# Altium PCB PNEV5180B_V2.0.PcbDoc (part 1 of 2)
Units mm, origin at the board's own origin, x right, y up, seen from the top; angles counter-clockwise.
Board outline 154.43 x 67.26 mm, 4 copper layers (Top Layer, Top, Internal Plane 1, MidLayer1, Bottom Layer, Bottom), stack 1.42 mm thick; 217 components, 117 nets, 604 pads, 342 vias.
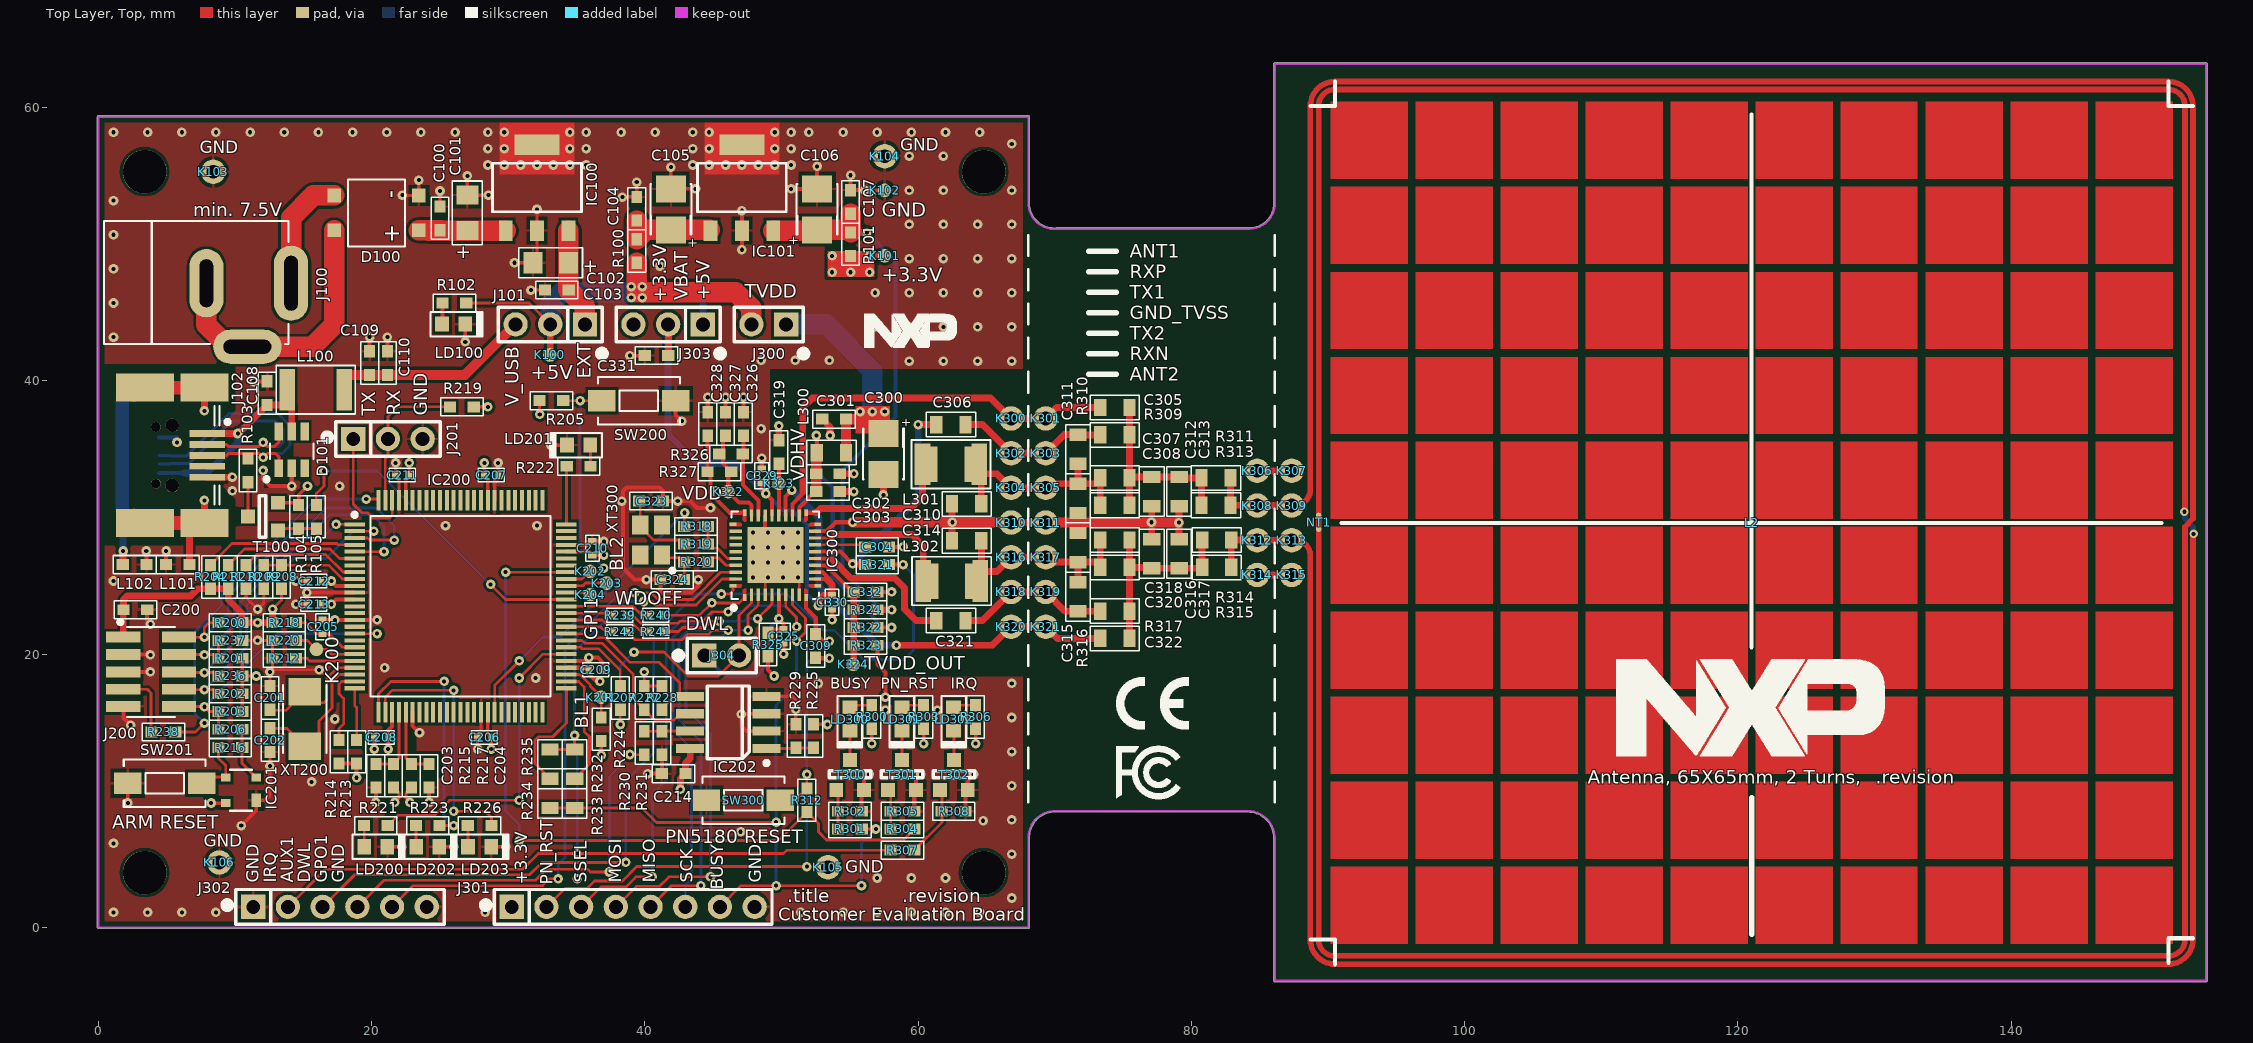
[diagram p0: Top Layer, Top view]
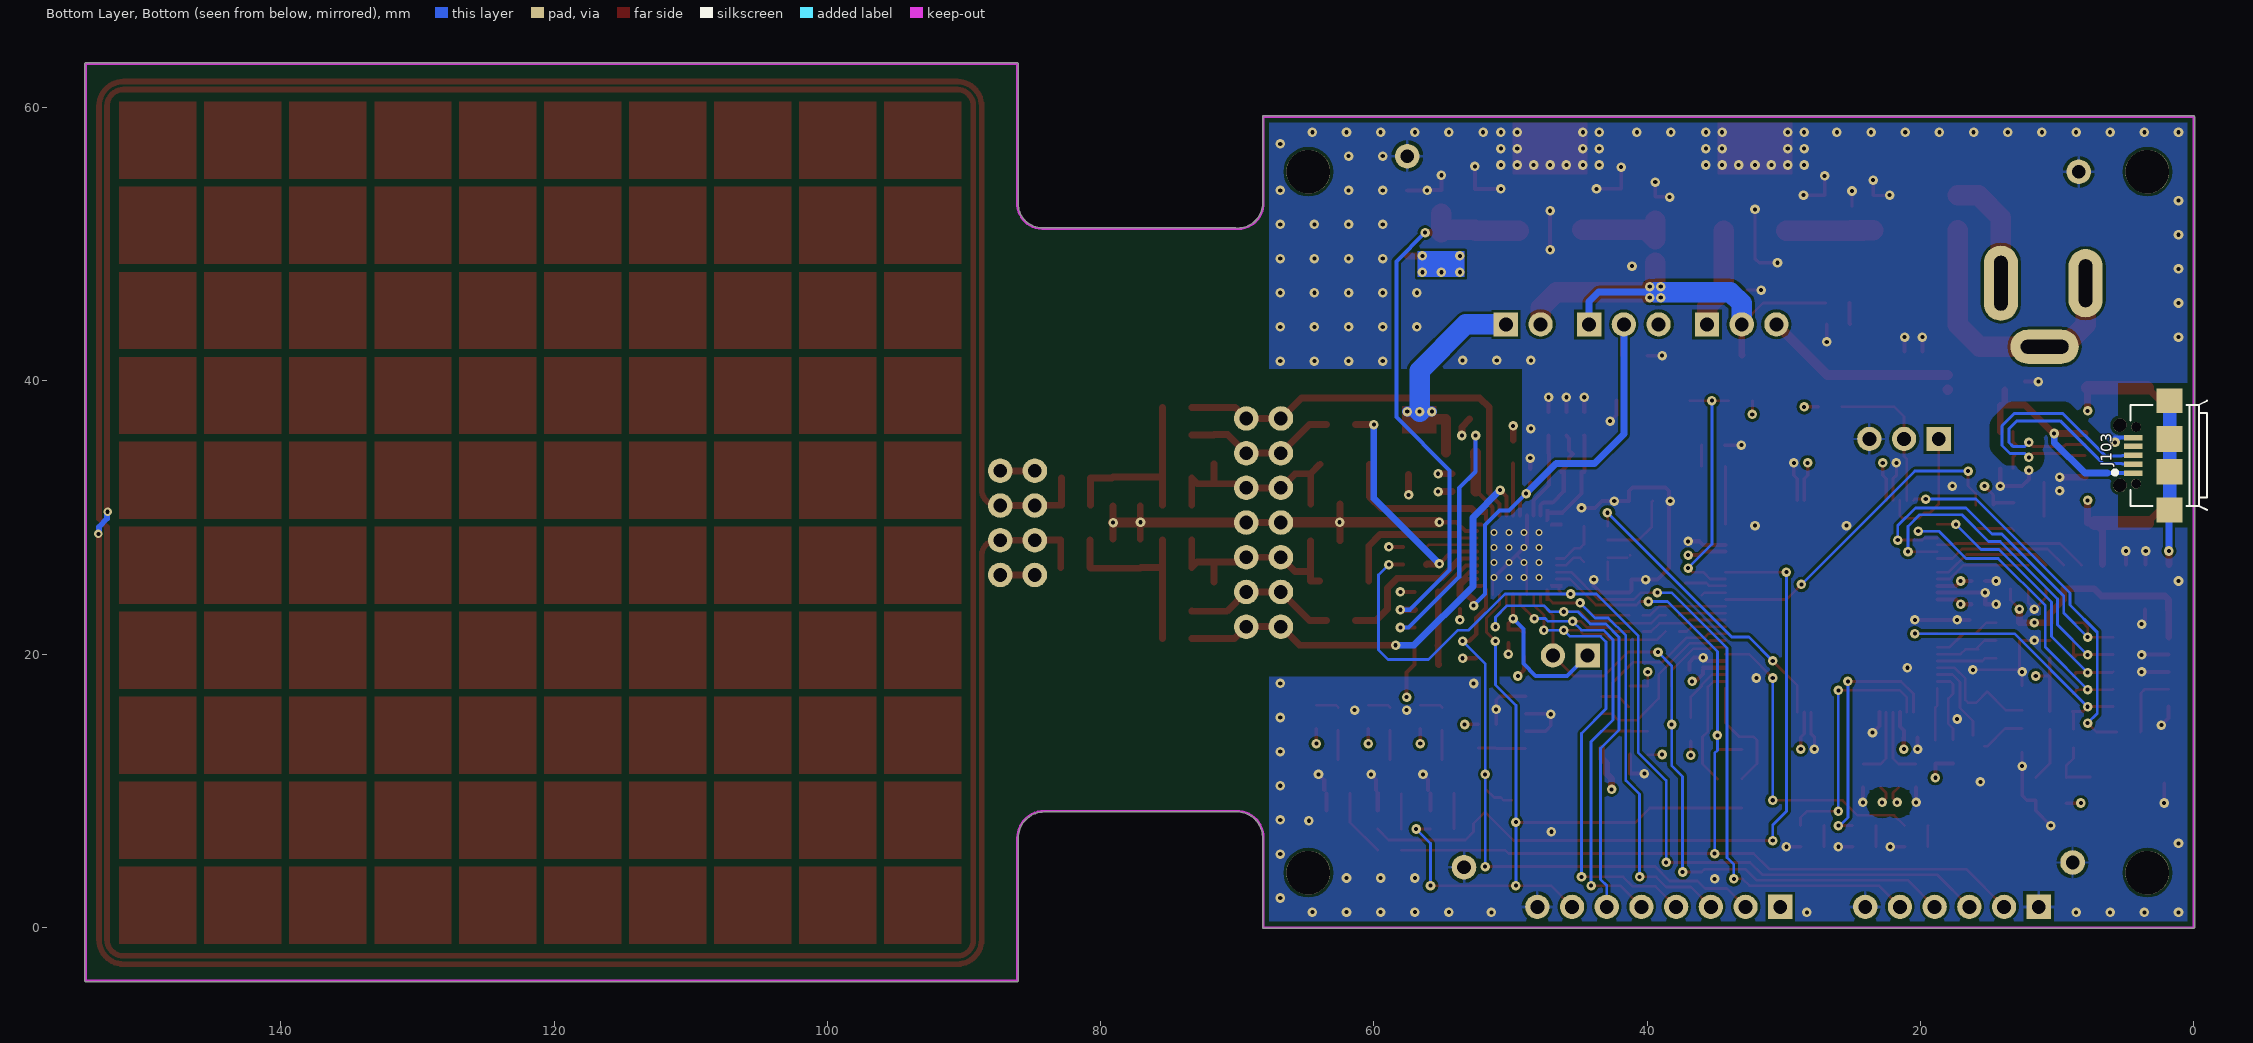
[diagram p1: Bottom Layer, Bottom view, seen from below]
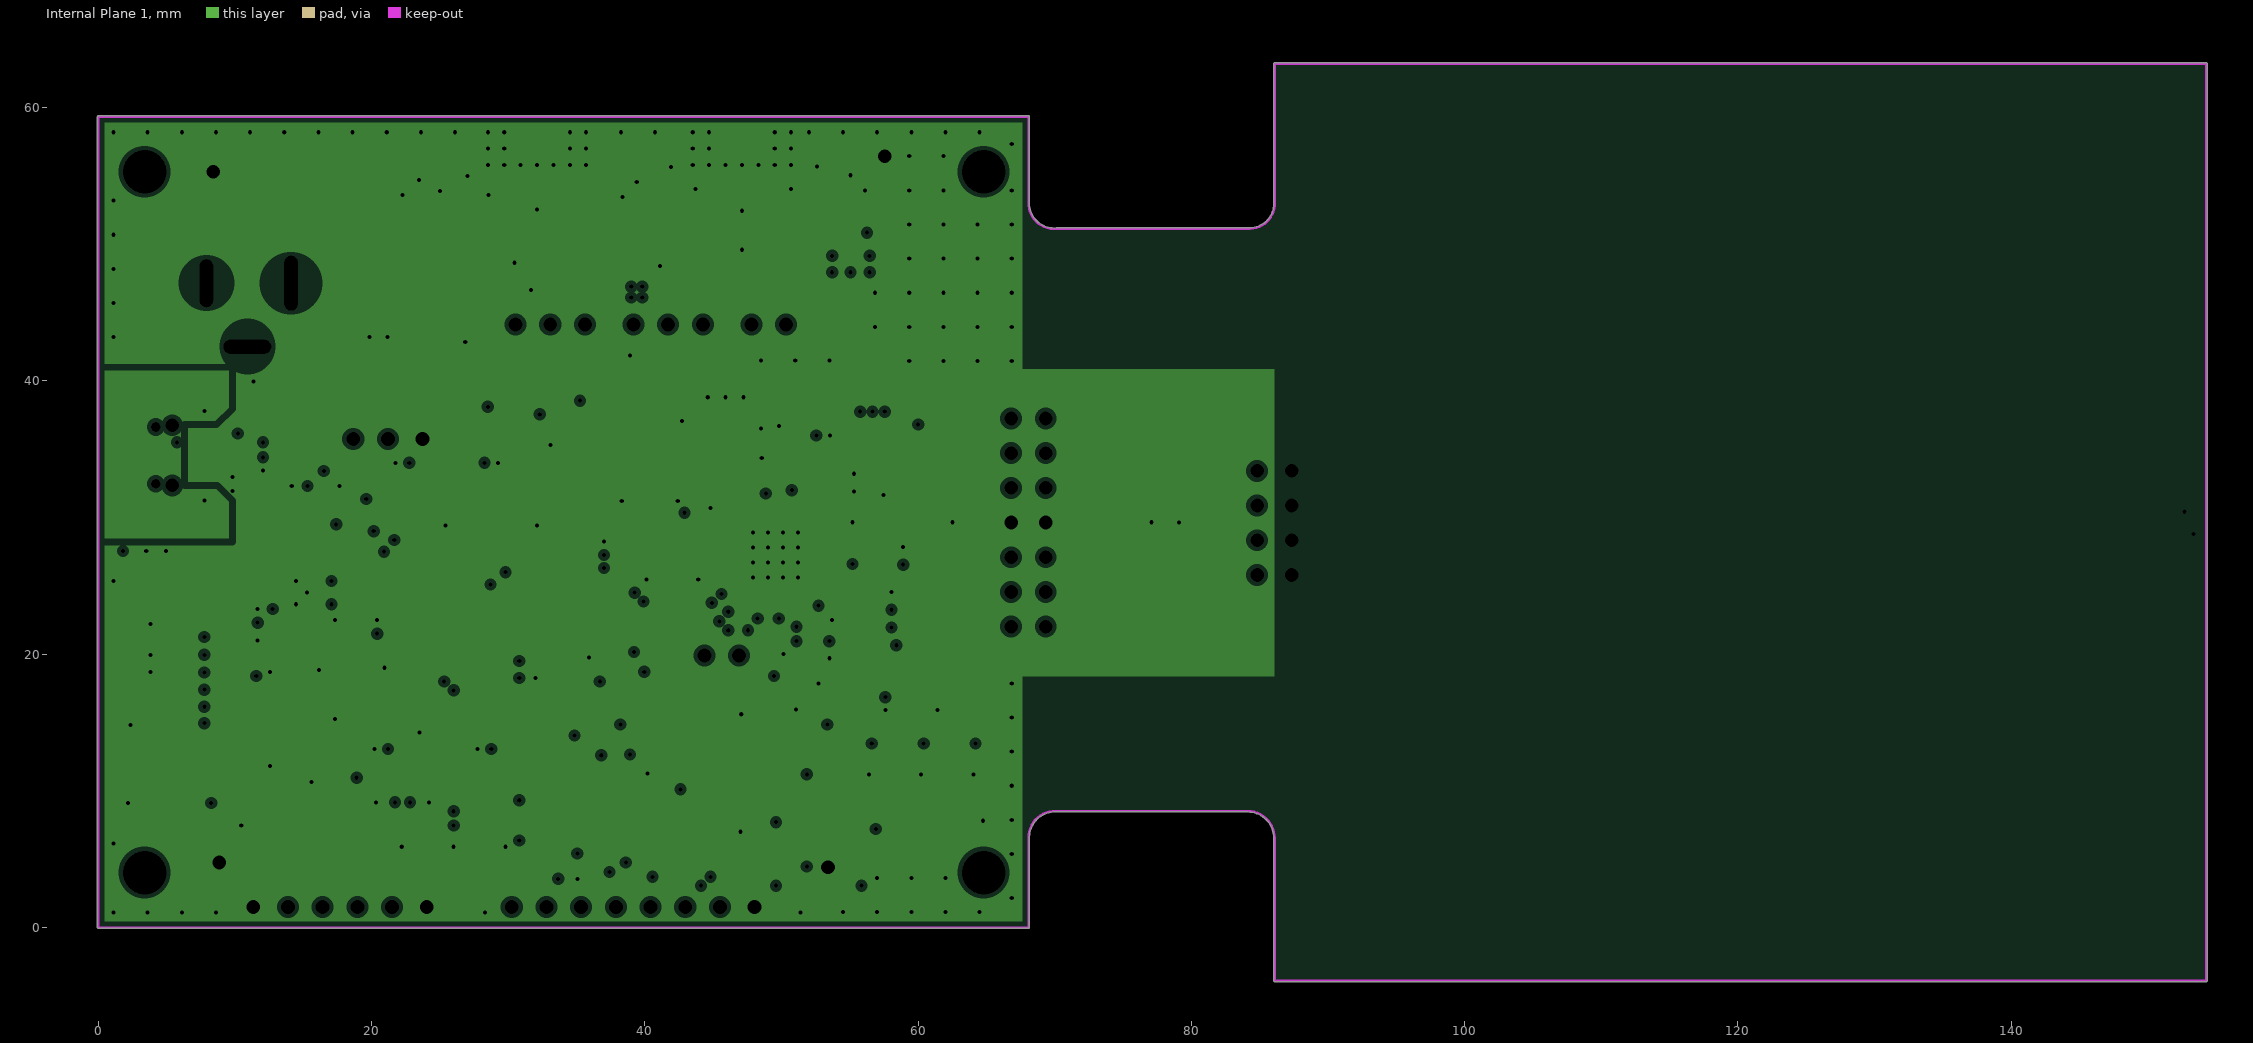
[diagram p2: Internal Plane 1, clearances drawn from the general rule]
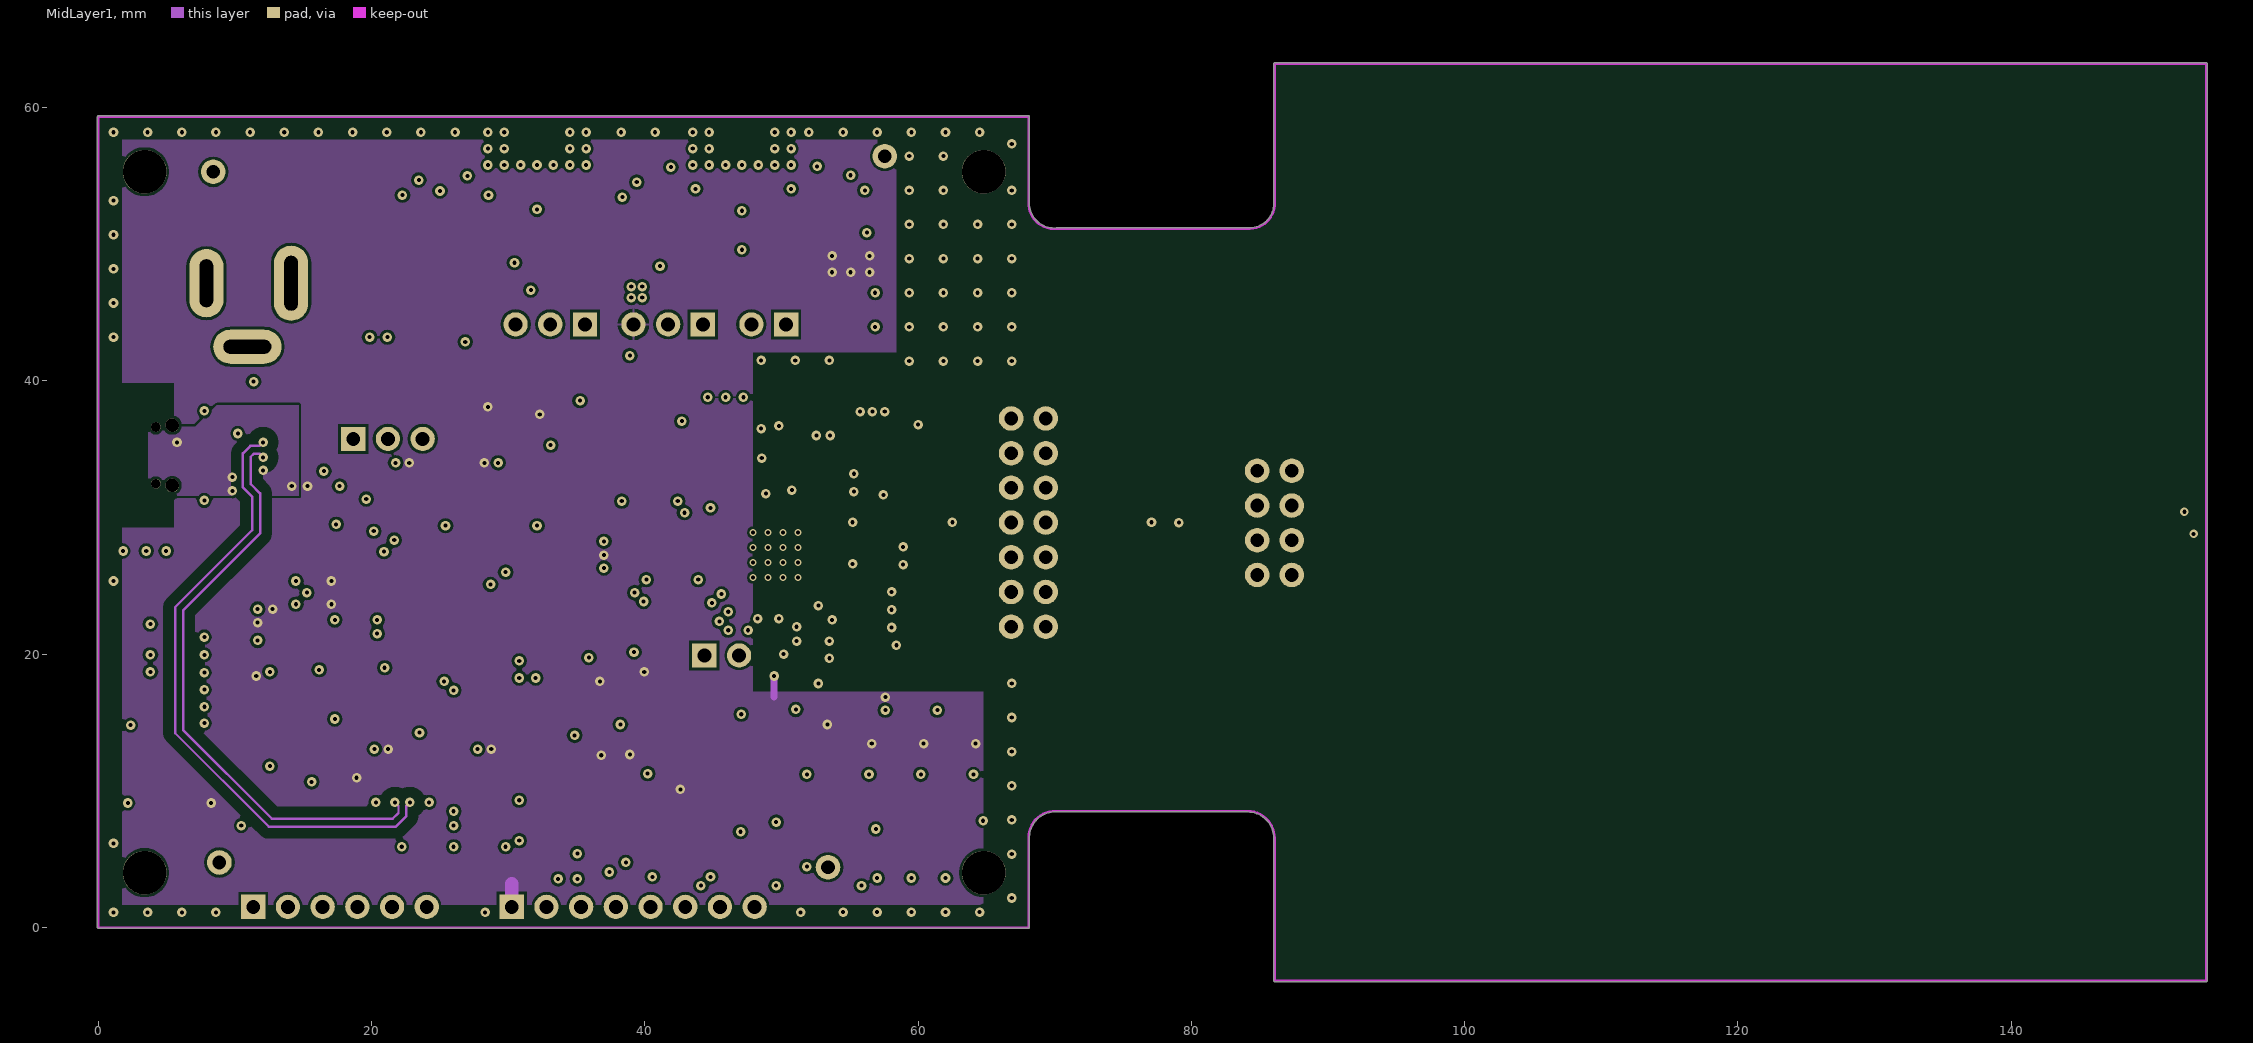
[diagram p3: MidLayer1]

## Layer stack, top to bottom
Top Solder, Top Mask: solder mask 0.0102, Solder Resist, Dk 3.5
Top Layer, Top: signal copper 0.035
Dielectric1: prepreg 0.14, FR-4, Dk 4.3
Internal Plane 1: plane copper 0.035, net (Multiple Nets)
Dielectric3: core 1, FR-4, Dk 4.3
MidLayer1: signal copper 0.035
Dielectric2: prepreg 0.14, FR-4, Dk 4.3
Bottom Layer, Bottom: signal copper 0.035
Bottom Solder, Bot Mask: solder mask 0.0102, Solder Resist, Dk 3.5

## Board outline
-0.075,0 ccw(c0,0) 0,-0.075 68.072,-0.075 ccw(c68.072,0) 68.147,0 68.147,6.617 cw(c70.015,6.58) 70.052,8.448 ccw(c70.053,8.523) 70.053,8.448 84.125,8.448 ccw(c84.125,8.523) 84.125,8.448 cw(c84.112,6.529) 86.031,6.529 cw(c84.112,6.529) 86.031,6.517 cw(c84.112,6.529) 86.031,6.517 86.031,6.516 cw(c86.106,6.516) 86.031,6.517 86.031,6.516 86.031,-3.9 ccw(c86.106,-3.9) 86.106,-3.975 154.28,-3.975 ccw(c154.28,-3.9) 154.355,-3.9 154.355,63.209 ccw(c154.28,63.209) 154.28,63.285 86.106,63.285 ccw(c86.106,63.209) 86.031,63.209 86.031,53.049 ccw(c86.106,53.049) 86.031,53.047 cw(c84.239,52.986) 86.032,52.986 cw(c84.239,52.986) 84.301,51.194 cw(c84.239,52.986) 84.3,51.194 84.303,51.194 70.129,51.194 ccw(c70.129,51.119) 70.123,51.194 cw(c69.964,53.011) 68.147,52.849 68.147,59.323 ccw(c68.072,59.323) 68.072,59.398 0,59.398 ccw(c0,59.323) -0.075,59.323

## Design rules (kind name [scope] priority, off if disabled: settings)
Clearance Clearance_1 [InNet('NetK312_1') vs InNet('NetK308_1')] p1: gap=0.13
Clearance Clearance_poly1 [InNamedPolygon('Mid1-GND_1') or InNamedPolygon('Mid1+3.3V') or InNamedPolygon('Top-GND_1') or InNamedPolygon('Bot-GND_1') vs (InDifferentialPairClass('All Differential Pairs'))] p2: gap=0.8
Clearance [All] p3: gap=0.2
ComponentClearance [All] p1: gap=0.254 collisioncheckmode=3 verticalgap=0 showdistances=FALSE
DiffPairsRouting DiffPairsRouting_90 [InDifferentialPairClass('90ohm')] p1: maxlimit=0.4 minlimit=0.3 mostfreqgap=0.4 toplayer_maxgap=0.3 toplayer_prefgap=0.3 toplayer_minwidth=0.22 toplayer_maxwidth=0.22 toplayer_prefwidth=0.22 midlayer1_mingap=0.4 midlayer1_minwidth=0.18 midlayer1_maxwidth=0.18 midlayer1_prefwidth=0.18 bottomlayer_maxgap=0.3 bottomlayer_prefgap=0.3 bottomlayer_minwidth=0.22 bottomlayer_maxwidth=0.22 bottomlayer_prefwidth=0.22 maxuncoupledlength=12.7
HoleSize [All] p1: absolutevalues=TRUE maxlimit=5 minlimit=0.15 maxpercent=80.000 minpercent=20.000
MinimumSolderMaskSliver [All] p1: minsoldermaskwidth=0.08
PlaneClearance PlaneClearance_diff [(InDifferentialPairClass('All Differential Pairs'))] p1: clearance=0.4
PlaneClearance [All] p2: clearance=0.3
PlaneConnect [All] p1: planeconnectstyle=Relief reliefexpansion=0.25 reliefentries=4 reliefconductorwidth=0.2 reliefairgap=0.2
PolygonConnect PolygonConnect_1 [isvia] p1: connectstyle=Direct reliefconductorwidth=0.254 reliefentries=4 polygonreliefangle="90 Angle" airgapwidth=0.254
PolygonConnect [All] p2: connectstyle=Relief reliefconductorwidth=0.2 reliefentries=4 polygonreliefangle="90 Angle" airgapwidth=0.25
RoutingVias [All] p1: holewidth=0.3 width=0.7 viastyle="Through Hole" minholewidth=0.2 minwidth=0.6 maxholewidth=0.5 maxwidth=1
SilkToSilkClearance [All] p1: silktosilkclearance=0
SilkToSolderMaskClearance SilkscreenOverComponentPads [IsPad] p1: minsilkscreentomaskgap=0 clearancetoexposedcopper=TRUE
SolderMaskExpansion SolderMaskExpansion_Via [IsVia] p1: expansion=-0.1
SolderMaskExpansion [All] p2: expansion=0.08
Width [All] p1: maxlimit=4 minlimit=0.2 preferedwidth=0.2 minimp=50.000000 maximp=50.000000 favimp=50.000000
22 further rules are at their usual default settings.

## Classes and differential pairs
differential pair class 90ohm: USB
component class "Power Supply": C100 C101 C102 C103 C104 C105 C106 C107 C108 C109 C110 D100 D101 IC100 IC101 J100 J101 J102 J103 K100 K101 K102 K103 K104 K105 K106 L100 L101 L102 LD100 R100 R101 R102 R103 R104 R105 T100
component class Processor: C200 C201 C202 C203 C204 C205 C206 C207 C208 C209 C210 C211 C212 C213 C214 IC200 IC201 IC202 J200 J201 K200 K201 K202 K203 K204 LD200 LD201 LD202 LD203 R200 R201 R202 R203 R204 R205 R206 R207 R208 R209 R210 R211 R212 R213 R214 R215 R216 R217 R218 R219 R220 R221 R222 R223 R224 R225 R226 R227 R228 R229 R230 R231 R232 R233 R234 R235 R236 R237 R238 R239 R240 R241 R242 SW200 SW201 XT200
component class Reader_PN5108: C300 C301 C302 C303 C304 C305 C306 C307 C308 C309 C310 C311 C312 C313 C314 C315 C316 C317 C318 C319 C320 C321 C322 C323 C324 C325 C326 C327 C328 C329 C330 C331 C332 IC300 J300 J301 J302 J303 J304 K300 K301 K302 K303 K304 K305 K306 K307 K308 K309 K310 K311 K312 K313 K314 K315 K316 K317 K318 K319 K320 K321 K322 K323 K324 L300 L301 L302 LD300 LD301 LD302 NT1 R300 R301 R302 R303 R304 R305 R306 R307 R308 R309 R310 R311 R312 R313 R314 R315 R316 R317 R318 R319 R320 R321 R322 R323 R324 R325 R326 R327 SW300 T300 T301 T302 XT300
differential pair USB: +USB_P -USB_N

## Components (designator, comment, footprint, x,y, rotation, side; value= is the part's Value field where it differs from the comment)
C100 "100nF" Y0603 25,51.9 r90 top
C101 "10uF/16V" CAP_TANT_1206_CASE-A 27,52.3 r90 top
C102 "10uF/16V" CAP_TANT_1206_CASE-A 33.1,48.65 r180 top
C103 "100nF" Y0603 33.55,46.65 r180 top
C104 "100nF" Y0603 39.4,52.6 r90 top
C105 "33uF/10V" C_TANTAL_B 41.9,52.55 r90 top
C106 "33uF/10V" C_TANTAL_B 52.6,52.55 r90 top
C107 "100nF" Y0603 55.05,53.1 r90 top
C108 "1uF" Y0603 12.35,39.1 r90 top
C109 "1uF" Y0603 19.85,41.3 r90 top
C110 "100nF" Y0603 21.15,41.3 r90 top
C200 "100nF" Y0603 2.7,23.25 r0 top
C201 "15pF" Y0603 12.55,16.8 r90 top
C202 "15pF" Y0603 12.55,13.7 r270 top
C203 "15pF" Y0603 20.3,11.1 r90 top
C204 "15pF" Y0603 24.2,11.1 r90 top
C205 "100nF" Y0402 16.4,22 r270 top
C206 "100nF" Y0402 28.25,13.9 r0 top
C207 "100nF" Y0402 28.75,33.1 r180 top
C208 "100nF" Y0402 20.7,13.9 r0 top
C209 "100nF" Y0402 36.4,18.85 r180 top
C210 "100nF" Y0402 36.15,27.75 r270 top
C211 "100nF" Y0402 22.25,33.1 r0 top
C212 "100nF" Y0402 15.75,25.35 r0 top
C213 "100nF" Y0402 15.75,23.65 r0 top
C214 "100nF" Y0603 42.1,11.25 r0 top
C300 "100uF/10V" C_TANTAL_B 57.45,34.65 r270 top
C301 "100nF" Y0603 53.85,37.2 r0 top
C302 "6u8" Y0603 53.4,33.2 r0 top
C303 "100nF" Y0603 53.4,31.9 r180 top
C304 "100nF" Y0603 57,27.85 r180 top
C305 "82pF" Y0805 74.4,38.05 r0 top
C306 "1nF" Y0805 62.4,36.8 r0 top
C307 "15pF" Y0805 74.4,32.9 r0 top
C308 "18pF" Y0805 74.4,30.9 r0 top
C309 "100nF" Y0603 52.5,20.6 r270 top
C310 "220pF" Y0805 63.55,31 r0 top
C311 "33pF" Y0805 71.7,31.4 r90 top
C312 "120pF" Y0805 77.1,31.9 r90 top
C313 "82pF" Y0805 79.1,31.9 r90 top
C314 "220pF" Y0805 63.55,28.3 r180 top
C315 "33pF" Y0805 71.7,27.8 r90 top
C316 "120pF" Y0805 77.1,27.35 r90 top
C317 "82pF" Y0805 79.1,27.35 r90 top
C318 "18pF" Y0805 74.4,28.35 r0 top
C319 "470nF" Y0603 49.8,34.8 r90 top
C320 "15pF" Y0805 74.4,26.35 r0 top
C321 "1nF" Y0805 62.4,22.45 r0 top
C322 "82pF" Y0805 74.4,21.15 r0 top
C323 "15pF" Y0603 40.45,31.2 r180 top
C324 "15pF" Y0603 42,25.45 r0 top
C325 "100nF" Y0402 50.15,21.3 r90 top
C326 "100nF" Y0603 47.2,36.85 r90 top
C327 "1uF" Y0603 45.9,36.85 r90 top
C328 "100nF" Y0603 44.6,36.85 r90 top
C329 "100nF" Y0402 48.55,33.058 r270 top
C330 "100nF" Y0402 53.7,23.8 r90 top
C331 "4u7" Y0603 40.85,41.85 r180 top
C332 "100nF" Y0603 56.15,24.55 r180 top
D100 "CDBHM240L" GRETZ_MBS2 20.35,52.3 r270 top
D101 "IP4220CZ6" SOT-457 14.15,34.95 r90 top
IC100 "LT1129CST-5" SOT-223-3 32.1,54.15 r0 top
IC101 "LM3940IMP-3.3" SOT-223-3 47.1,54.15 r0 top
IC200 "LPC1769FBD100" TSQFP50P1600X1600X160-100N 26.5,23.5 r0 top
IC201 "MAX811" SOT143B 11.45,9.3 r90 top
IC202 "24C128 DNP" SOIC8 46.1,15 r180 top
IC300 "PN5180" QFN50P600X600X100_HS-41N 49.55,27.25 r90 top
J100 "PWR_DC_PJ-202A" CON_JCK_2.5MM 7.9,47.15 r0 top
J101 "3pin JMP" CON3M-LINE 35.611,44.134 r180 top
J102 "MINI USB-B" CON_USB-B-MINI_SD-67503-010_5075BMR-05-SM-CR 7.75,34.55 r0 top
J103 "MICRO USB-B" "CON_USB_MICRO_B_WE-629 105 136 821" 1.75,34.55 r90 bottom
J200 "FTS-105-01-L-DV" CON_FTS-105-01-L-DV 3.85,18.7 r270 top
J201 "LPC INIT DNP" CON3M-LINE 18.65,35.75 r0 top
J300 "TVDD" CON2 50.334,44.134 r180 top
J301 "CON8M_LINE" CON8M-LINE 30.251,1.5 r0 top locked
J302 "CON6M_LINE" CON6M-LINE 11.328,1.5 r0 top locked
J303 "3pin JMP" CON3M-LINE 44.238,44.134 r180 top
J304 "DWL JMP" CON2 44.35,19.9 r0 top
K100 "TP1" TESTP_ROUND_1.0mm 33.05,41.9 r90 top
K101 "TP1" TESTP_ROUND_1.0mm 57.55,49.15 r90 top
K102 "TP1" TESTP_ROUND_1.0mm 57.55,53.95 r90 top
K103 "TP_1.0mm" CON1_PIN_Round_1.0x1.8mm 8.4,55.3 r90 top
K104 "TP_1.0mm" CON1_PIN_Round_1.0x1.8mm 57.55,56.45 r90 top
K105 "TP_1.0mm" CON1_PIN_Round_1.0x1.8mm 53.4,4.4 r90 top
K106 "TP_1.0mm" CON1_PIN_Round_1.0x1.8mm 8.85,4.75 r90 top
K200 "TP1" TESTP_ROUND_1.0mm 15.95,20.35 r180 top
K201 "TP1" TESTP_ROUND_1.0mm 36.8,16.85 r0 top
K202 "TP1" TESTP_ROUND_1.0mm 36,26.05 r180 top
K203 "TP1" TESTP_ROUND_1.0mm 37.2,25.2 r180 top
K204 "TP1" TESTP_ROUND_1.0mm 36,24.35 r90 top
K300 "TP_1.0mm" CON1_PIN_Round_1.0x1.8mm 66.802,37.25 r0 top
K301 "TP_1.0mm" CON1_PIN_Round_1.0x1.8mm 69.342,37.25 r0 top
K302 "TP_1.0mm" CON1_PIN_Round_1.0x1.8mm 66.802,34.71 r0 top
K303 "TP_1.0mm" CON1_PIN_Round_1.0x1.8mm 69.342,34.71 r0 top
K304 "TP_1.0mm" CON1_PIN_Round_1.0x1.8mm 66.802,32.17 r0 top
K305 "TP_1.0mm" CON1_PIN_Round_1.0x1.8mm 69.342,32.17 r0 top
K306 "TP_1.0mm" CON1_PIN_Round_1.0x1.8mm 84.811,33.415 r0 top
K307 "TP_1.0mm" CON1_PIN_Round_1.0x1.8mm 87.351,33.415 r0 top
K308 "TP_1.0mm" CON1_PIN_Round_1.0x1.8mm 84.811,30.875 r0 top
K309 "TP_1.0mm" CON1_PIN_Round_1.0x1.8mm 87.351,30.875 r0 top
K310 "TP_1.0mm" CON1_PIN_Round_1.0x1.8mm 66.802,29.63 r0 top
K311 "TP_1.0mm" CON1_PIN_Round_1.0x1.8mm 69.342,29.63 r0 top
K312 "TP_1.0mm" CON1_PIN_Round_1.0x1.8mm 84.811,28.335 r0 top
K313 "TP_1.0mm" CON1_PIN_Round_1.0x1.8mm 87.351,28.335 r0 top
K314 "TP_1.0mm" CON1_PIN_Round_1.0x1.8mm 84.811,25.795 r0 top
K315 "TP_1.0mm" CON1_PIN_Round_1.0x1.8mm 87.351,25.795 r0 top
K316 "TP_1.0mm" CON1_PIN_Round_1.0x1.8mm 66.802,27.09 r0 top
K317 "TP_1.0mm" CON1_PIN_Round_1.0x1.8mm 69.342,27.09 r0 top
K318 "TP_1.0mm" CON1_PIN_Round_1.0x1.8mm 66.802,24.55 r0 top
K319 "TP_1.0mm" CON1_PIN_Round_1.0x1.8mm 69.342,24.55 r0 top
K320 "TP_1.0mm" CON1_PIN_Round_1.0x1.8mm 66.803,22.01 r0 top
K321 "TP_1.0mm" CON1_PIN_Round_1.0x1.8mm 69.343,22.01 r0 top
K322 "TP1" TESTP_ROUND_1.0mm 46.1,31.9 r90 top
K323 "TP1" TESTP_ROUND_1.0mm 49.8,32.5 r90 top
K324 "TP1" TESTP_ROUND_1.0mm 55.25,19.25 r90 top
L2 "Antenna, 65X65mm, 2 Turns," ANTENNA_65X65MM_2TURNS_FRED 121.006,29.605 r0 top
L100 "100nH" INDCC_1812 15.9,39.35 r0 top
L101 "BLM18PG181SN1" Y0603 5.8,26.55 r0 top
L102 "BLM18PG181SN1" Y0603 2.65,26.55 r180 top
L300 "22nH" Y0805 53.65,34.75 r0 top
L301 "470nH / shielded (1210)" INDCC_1812_1210 62.4,33.9 r0 top
L302 "470nH / shielded (1210)" INDCC_1812_1210 62.45,25.35 r0 top
LD100 "LEDY0603" LED_0603 26,44.15 r180 top
LD200 "ORANGE" LED_0603 20.3,5.9 r180 top
LD201 "RED" LED_0603 35.15,35.3 r0 top
LD202 "BLUE" LED_0603 24.1,5.9 r180 top
LD203 "GREEN" LED_0603 27.9,5.9 r180 top
LD300 "ORANGE" LED_0603 55,15.25 r90 top
LD301 "BLUE" LED_0603 58.8,15.25 r90 top
LD302 "GREEN" LED_0603 62.6,15.25 r90 top
NT1 "Net_Tie" Net_Tie_SMT_0.406mm 89.306,29.65 r90 top net-tie
R100 "0R" Y0603 39.4,49.5 r270 top
R101 "0R" Y0603 55.05,50 r90 top
R102 "2k2" Y0603 26.05,45.7 r0 top
R103 "1k5" Y0603 10.95,33.45 r270 top
R104 "10k" Y0603 14.65,30.05 r90 top
R105 "1k5" Y0603 15.95,30.05 r270 top
R200 "10k" Y0603 9.65,22.3 r0 top
R201 "10k" Y0603 9.65,19.7 r0 top
R202 "10k" Y0603 9.65,17.1 r0 top
R203 "10k" Y0603 9.65,15.8 r0 top
R204 "10k" Y0603 8.2,25.65 r270 top
R205 "10k" Y0603 33.15,38.55 r0 top
R206 "1k" Y0603 9.65,14.5 r180 top
R207 "2k7" Y0603 38.2,16.8 r90 top
R208 "3k3" Y0603 13.4,25.65 r90 top
R209 "10k" Y0603 12.1,25.65 r90 top
R210 "1k" Y0603 10.8,25.65 r90 top
R211 "TBD DNP" Y0603 9.5,25.65 r90 top
R212 "1k" Y0603 13.6,19.7 r0 top
R213 "1k5" Y0603 18.9,12.85 r90 top
R214 "1k5" Y0603 17.6,12.85 r90 top
R215 "33R" Y0603 21.6,11.1 r90 top
R216 "0R DNP" Y0603 9.65,13.15 r0 top
R217 "33R" Y0603 22.9,11.1 r90 top
R218 "0R" Y0603 13.6,22.3 r180 top
R219 "10k" Y0603 26.6,38.1 r0 top
R220 "3k3" Y0603 13.6,21 r0 top
R221 "1k" Y0603 20.3,7.45 r180 top
R222 "1k" Y0603 35.15,33.75 r0 top
R223 "470R" Y0603 24.1,7.45 r180 top
R224 "10k" Y0603 36.8,14.5 r270 top
R225 "10k" Y0603 52.35,14 r270 top
R226 "1k" Y0603 27.9,7.45 r180 top
R227 "1k5" Y0603 39.95,16.8 r270 top
R228 "1k5" Y0603 41.25,16.8 r270 top
R229 "0R" Y0603 51.05,14 r90 top
R230 "10k" Y0603 39.95,13.5 r90 top
R231 "0R" Y0603 41.25,13.5 r270 top
R232 "0R DNP" Y0805 34.85,11.95 r270 top
R233 "0R" Y0805 34.85,9.8 r90 top
R234 "0R DNP" Y0805 33.05,9.8 r90 top
R235 "0R" Y0805 33.05,11.95 r270 top
R236 "10k DNP" Y0603 9.65,18.4 r0 top
R237 "10k DNP" Y0603 9.65,21 r180 top
R238 "0R DNP" Y0603 4.75,14.3 r180 top
R239 "0R" Y0402 38.15,22.85 r180 top
R240 "0R" Y0402 40.8,22.85 r180 top
R241 "0R" Y0402 40.8,21.65 r180 top
R242 "0R" Y0402 38.15,21.65 r180 top
R300 "1k" Y0603 56.6,15.4 r270 top
R301 "1k" Y0603 55,7.2 r0 top
R302 "4k7" Y0603 55,8.5 r0 top
R303 "470R" Y0603 60.4,15.4 r270 top
R304 "1k" Y0603 58.85,7.2 r0 top
R305 "4k7" Y0603 58.85,8.5 r0 top
R306 "1k" Y0603 64.2,15.4 r270 top
R307 "1k" Y0603 58.85,5.65 r180 top
R308 "4k7" Y0603 62.6,8.5 r0 top
R309 "TBD DNP" Y0805 74.4,36.05 r180 top
R310 "4k7" Y0805 71.7,35 r270 top
R311 "2R2" Y0805 81.8,32.9 r180 top
R312 "2k7" Y0603 51.85,9.3 r90 top
R313 "2R2" Y0805 81.8,30.9 r180 top
R314 "2R2" Y0805 81.85,28.35 r180 top
R315 "2R2" Y0805 81.85,26.35 r180 top
R316 "4k7" Y0805 71.7,24.2 r270 top
R317 "TBD DNP" Y0805 74.4,23.15 r180 top
R318 "0R DNP" Y0603 43.75,29.35 r0 top
R319 "0R" Y0603 43.75,28.05 r0 top
R320 "0R" Y0603 43.75,26.75 r0 top
R321 "TBD DNP" Y0603 57,26.55 r0 top
R322 "TBD DNP" Y0603 56.15,21.95 r180 top
R323 "TBD DNP" Y0603 56.15,20.65 r180 top
R324 "TBD DNP" Y0603 56.15,23.25 r180 top
R325 "0R" Y0603 49,20.7 r270 top
R326 "0R" Y0603 46.3,34.65 r180 top
R327 "0R" Y0603 45.45,33.35 r0 top
SW200 "DTSM-32S-B DNP" SW_DTSM-32S-B 39.55,38.55 r0 top locked
SW201 "DTSM-32S-B" SW_DTSM-32S-B 4.85,10.55 r0 top
SW300 "DTSM-32S-B" SW_DTSM-32S-B 47.2,9.3 r0 top
T100 "BC807" SOT-23 13.15,29.05 r90 top
T300 "BC817" SOT-23 54,10.05 r0 top
T301 "BC817" SOT-23 57.8,10.05 r0 top
T302 "BC817" SOT-23 61.6,10.05 r0 top
XT200 "12MHz" QUARTZ_NX5032GA 15.1,15.25 r90 top
XT300 "27.12MHz" QUARTZ_32SMX 40.45,28.35 r90 top

## Footprints (in the part's own frame and the unit in brackets; to place one, negate y for a bottom-side part, rotate by r counter-clockwise, add the part's x,y. Pads: shape width x height; smd on the part's side, far side on the other; paste and mask are expansions set on the pad)
ANTENNA_65X65MM_2TURNS_FRED [mm] "ANTENNA_65X65MM_2TURNS_FRED"
  Top Layer, Top region: 0.305,0.305 0.305,5.944 5.944,5.944 5.944,0.305
  Top Layer, Top region: 6.528,0.305 6.528,5.944 12.141,5.944 12.141,0.305
  Top Layer, Top region: 12.751,0.305 12.751,5.944 18.364,5.944 18.364,0.305
  Top Layer, Top region: 18.974,0.305 18.974,5.944 24.587,5.944 24.587,0.305
  Top Layer, Top region: 25.197,0.305 25.197,5.944 30.81,5.944 30.81,0.305
  Top Layer, Top region: 0.305,6.528 0.305,12.141 5.944,12.141 5.944,6.528
  Top Layer, Top region: 6.528,6.528 6.528,12.141 12.141,12.141 12.141,6.528
  Top Layer, Top region: 12.751,6.528 12.751,12.141 18.364,12.141 18.364,6.528
  Top Layer, Top region: 18.974,6.528 18.974,12.141 24.587,12.141 24.587,6.528
  Top Layer, Top region: 25.197,6.528 25.197,12.141 30.81,12.141 30.81,6.528
  Top Layer, Top region: 0.305,12.751 0.305,18.364 5.944,18.364 5.944,12.751
  Top Layer, Top region: 6.528,12.751 6.528,18.364 12.141,18.364 12.141,12.751
  Top Layer, Top region: 12.751,12.751 12.751,18.364 18.364,18.364 18.364,12.751
  Top Layer, Top region: 18.974,12.751 18.974,18.364 24.587,18.364 24.587,12.751
  Top Layer, Top region: 25.197,12.751 25.197,18.364 30.81,18.364 30.81,12.751
  Top Layer, Top region: 0.305,18.974 0.305,24.587 5.944,24.587 5.944,18.974
  Top Layer, Top region: 6.528,18.974 6.528,24.587 12.141,24.587 12.141,18.974
  Top Layer, Top region: 12.751,18.974 12.751,24.587 18.364,24.587 18.364,18.974
  Top Layer, Top region: 18.974,18.974 18.974,24.587 24.587,24.587 24.587,18.974
  Top Layer, Top region: 25.197,18.974 25.197,24.587 30.81,24.587 30.81,18.974
  Top Layer, Top region: 0.305,25.197 0.305,30.81 5.944,30.81 5.944,25.197
  Top Layer, Top region: 6.528,25.197 6.528,30.81 12.141,30.81 12.141,25.197
  Top Layer, Top region: 12.751,25.197 12.751,30.81 18.364,30.81 18.364,25.197
  Top Layer, Top region: 18.974,25.197 18.974,30.81 24.587,30.81 24.587,25.197
  Top Layer, Top region: 25.197,25.197 25.197,30.81 30.81,30.81 30.81,25.197
  Top Layer, Top region: 0.305,-30.8 0.305,-25.18 5.944,-25.18 5.944,-30.8
  Top Layer, Top region: 6.528,-30.8 6.528,-25.18 12.141,-25.18 12.141,-30.8
  Top Layer, Top region: 12.751,-30.8 12.751,-25.18 18.364,-25.18 18.364,-30.8
  Top Layer, Top region: 18.974,-30.8 18.974,-25.18 24.587,-25.18 24.587,-30.8
  Top Layer, Top region: 25.197,-30.8 25.197,-25.18 30.81,-25.18 30.81,-30.8
  Top Layer, Top region: 0.305,-24.58 0.305,-18.96 5.944,-18.96 5.944,-24.58
  Top Layer, Top region: 6.528,-24.58 6.528,-18.96 12.141,-18.96 12.141,-24.58
  Top Layer, Top region: 12.751,-24.58 12.751,-18.96 18.364,-18.96 18.364,-24.58
  Top Layer, Top region: 18.974,-24.58 18.974,-18.96 24.587,-18.96 24.587,-24.58
  Top Layer, Top region: 25.197,-24.58 25.197,-18.96 30.81,-18.96 30.81,-24.58
  Top Layer, Top region: 0.305,-18.36 0.305,-12.74 5.944,-12.74 5.944,-18.36
  Top Layer, Top region: 6.528,-18.36 6.528,-12.74 12.141,-12.74 12.141,-18.36
  Top Layer, Top region: 12.751,-18.36 12.751,-12.74 18.364,-12.74 18.364,-18.36
  Top Layer, Top region: 18.974,-18.36 18.974,-12.74 24.587,-12.74 24.587,-18.36
  Top Layer, Top region: 25.197,-18.36 25.197,-12.74 30.81,-12.74 30.81,-18.36
  Top Layer, Top region: 0.305,-12.14 0.305,-6.52 5.944,-6.52 5.944,-12.14
  Top Layer, Top region: 6.528,-12.14 6.528,-6.52 12.141,-6.52 12.141,-12.14
  Top Layer, Top region: 12.751,-12.14 12.751,-6.52 18.364,-6.52 18.364,-12.14
  Top Layer, Top region: 18.974,-12.14 18.974,-6.52 24.587,-6.52 24.587,-12.14
  Top Layer, Top region: 25.197,-12.14 25.197,-6.52 30.81,-6.52 30.81,-12.14
  Top Layer, Top region: 0.305,-5.92 0.305,-0.3 5.944,-0.3 5.944,-5.92
  Top Layer, Top region: 6.528,-5.92 6.528,-0.3 12.141,-0.3 12.141,-5.92
  Top Layer, Top region: 12.751,-5.92 12.751,-0.3 18.364,-0.3 18.364,-5.92
  Top Layer, Top region: 18.974,-5.92 18.974,-0.3 24.587,-0.3 24.587,-5.92
  Top Layer, Top region: 25.197,-5.92 25.197,-0.3 30.81,-0.3 30.81,-5.92
  Top Layer, Top region: -30.8,-30.8 -30.8,-25.18 -25.18,-25.18 -25.18,-30.8
  Top Layer, Top region: -24.58,-30.8 -24.58,-25.18 -18.96,-25.18 -18.96,-30.8
  Top Layer, Top region: -18.36,-30.8 -18.36,-25.18 -12.74,-25.18 -12.74,-30.8
  Top Layer, Top region: -12.14,-30.8 -12.14,-25.18 -6.52,-25.18 -6.52,-30.8
  Top Layer, Top region: -5.92,-30.8 -5.92,-25.18 -0.3,-25.18 -0.3,-30.8
  Top Layer, Top region: -30.8,-24.58 -30.8,-18.96 -25.18,-18.96 -25.18,-24.58
  Top Layer, Top region: -24.58,-24.58 -24.58,-18.96 -18.96,-18.96 -18.96,-24.58
  Top Layer, Top region: -18.36,-24.58 -18.36,-18.96 -12.74,-18.96 -12.74,-24.58
  Top Layer, Top region: -12.14,-24.58 -12.14,-18.96 -6.52,-18.96 -6.52,-24.58
  Top Layer, Top region: -5.92,-24.58 -5.92,-18.96 -0.3,-18.96 -0.3,-24.58
  Top Layer, Top region: -30.8,-18.36 -30.8,-12.74 -25.18,-12.74 -25.18,-18.36
  Top Layer, Top region: -24.58,-18.36 -24.58,-12.74 -18.96,-12.74 -18.96,-18.36
  Top Layer, Top region: -18.36,-18.36 -18.36,-12.74 -12.74,-12.74 -12.74,-18.36
  Top Layer, Top region: -12.14,-18.36 -12.14,-12.74 -6.52,-12.74 -6.52,-18.36
  Top Layer, Top region: -5.92,-18.36 -5.92,-12.74 -0.3,-12.74 -0.3,-18.36
  Top Layer, Top region: -30.8,-12.14 -30.8,-6.52 -25.18,-6.52 -25.18,-12.14
  Top Layer, Top region: -24.58,-12.14 -24.58,-6.52 -18.96,-6.52 -18.96,-12.14
  Top Layer, Top region: -18.36,-12.14 -18.36,-6.52 -12.74,-6.52 -12.74,-12.14
  Top Layer, Top region: -12.14,-12.14 -12.14,-6.52 -6.52,-6.52 -6.52,-12.14
  Top Layer, Top region: -5.92,-12.14 -5.92,-6.52 -0.3,-6.52 -0.3,-12.14
  Top Layer, Top region: -30.8,-5.92 -30.8,-0.3 -25.18,-0.3 -25.18,-5.92
  Top Layer, Top region: -24.58,-5.92 -24.58,-0.3 -18.96,-0.3 -18.96,-5.92
  Top Layer, Top region: -18.36,-5.92 -18.36,-0.3 -12.74,-0.3 -12.74,-5.92
  Top Layer, Top region: -12.14,-5.92 -12.14,-0.3 -6.52,-0.3 -6.52,-5.92
  Top Layer, Top region: -5.92,-5.92 -5.92,-0.3 -0.3,-0.3 -0.3,-5.92
  Top Layer, Top region: -30.8,0.305 -30.8,5.944 -25.18,5.944 -25.18,0.305
  Top Layer, Top region: -24.58,0.305 -24.58,5.944 -18.96,5.944 -18.96,0.305
  Top Layer, Top region: -18.36,0.305 -18.36,5.944 -12.74,5.944 -12.74,0.305
  Top Layer, Top region: -12.14,0.305 -12.14,5.944 -6.52,5.944 -6.52,0.305
  Top Layer, Top region: -5.92,0.305 -5.92,5.944 -0.3,5.944 -0.3,0.305
  Top Layer, Top region: -30.8,6.528 -30.8,12.141 -25.18,12.141 -25.18,6.528
  Top Layer, Top region: -24.58,6.528 -24.58,12.141 -18.96,12.141 -18.96,6.528
  Top Layer, Top region: -18.36,6.528 -18.36,12.141 -12.74,12.141 -12.74,6.528
  Top Layer, Top region: -12.14,6.528 -12.14,12.141 -6.52,12.141 -6.52,6.528
  Top Layer, Top region: -5.92,6.528 -5.92,12.141 -0.3,12.141 -0.3,6.528
  Top Layer, Top region: -30.8,12.751 -30.8,18.364 -25.18,18.364 -25.18,12.751
  Top Layer, Top region: -24.58,12.751 -24.58,18.364 -18.96,18.364 -18.96,12.751
  Top Layer, Top region: -18.36,12.751 -18.36,18.364 -12.74,18.364 -12.74,12.751
  Top Layer, Top region: -12.14,12.751 -12.14,18.364 -6.52,18.364 -6.52,12.751
  Top Layer, Top region: -5.92,12.751 -5.92,18.364 -0.3,18.364 -0.3,12.751
  Top Layer, Top region: -30.8,18.974 -30.8,24.587 -25.18,24.587 -25.18,18.974
  Top Layer, Top region: -24.58,18.974 -24.58,24.587 -18.96,24.587 -18.96,18.974
  Top Layer, Top region: -18.36,18.974 -18.36,24.587 -12.74,24.587 -12.74,18.974
  Top Layer, Top region: -12.14,18.974 -12.14,24.587 -6.52,24.587 -6.52,18.974
  Top Layer, Top region: -5.92,18.974 -5.92,24.587 -0.3,24.587 -0.3,18.974
  Top Layer, Top region: -30.8,25.197 -30.8,30.81 -25.18,30.81 -25.18,25.197
  Top Layer, Top region: -24.58,25.197 -24.58,30.81 -18.96,30.81 -18.96,25.197
  Top Layer, Top region: -18.36,25.197 -18.36,30.81 -12.74,30.81 -12.74,25.197
  Top Layer, Top region: -12.14,25.197 -12.14,30.81 -6.52,30.81 -6.52,25.197
  Top Layer, Top region: -5.92,25.197 -5.92,30.81 -0.3,30.81 -0.3,25.197
  Top Layer, Top lines w0.406: -33.5,-1.27 cw(c-33.424,-2.394) -32.3,-2.317 ; -33.5,1.27 ccw(c-33.484,2.454) -32.3,2.438 -32.3,30.505 cw(c-30.498,30.507) -30.5,32.309 30.505,32.309 cw(c30.505,30.505) 32.309,30.505 32.309,0.305 31.725,-0.3 31.725,-30.5 cw(c30.515,-30.49) 30.505,-31.7 -30.5,-31.7 cw(c-30.5,-30.5) -31.7,-30.5 -31.7,-0.455 ; -31.7,0.545 -31.7,30.505 cw(c-30.49,30.515) -30.5,31.725 30.505,31.725 cw(c30.505,30.505) 31.725,30.505 31.725,0.813 ; 32.309,-0.8 32.309,-30.5 cw(c30.507,-30.498) 30.505,-32.3 -30.5,-32.3 cw(c-30.5,-30.5) -32.3,-30.5 -32.3,-2.318 ; -32.3,-2.318 -32.3,-2.317 ; -32.3,-2.318 -32.3,-2.317 ; -32.3,-2.318 -32.3,-2.317 ; -32.3,-2.318 -32.3,-2.317 ; -32.3,-2.318 -32.3,-2.317 ; -32.3,-2.318 -32.3,-2.317 ; -32.3,-2.318 -32.3,-2.317 ; -32.3,-2.318 -32.3,-2.317
  Bottom Layer, Bottom lines w0.406: 31.725,0.813 31.725,0.305 32.309,-0.3 32.309,-0.8
  silkscreen extent -32.3,-32.3 32.31,32.31
C_TANTAL_B [mm] "Capacitor, SM Tantalum; Body 3.5 x 2.8 mm, Size B"
  rect 2x2.2 smd: 1(-1.5,0) 2(1.5,0)
  silkscreen extent -1.85,-1.5 1.85,1.5, body extent -1.85,-1.5 1.85,1.5, height 2.11
CAP_TANT_1206_CASE-A [mm] "AVX"
  rect 1.4x1.6 smd: 1(-1.3,0) 2(1.3,0)
  silkscreen extent -2.34,-1.1 2.34,1.1
CON1_PIN_Round_1.0x1.8mm [mm]
  round 1.8 hole 1: 1(0,0)
CON2 [mil]
  rect 70x70 hole 40: 1(0,0)
  round 70 hole 40: 2(100,0)
  silkscreen extent -60,-50 150,94
CON3M-LINE [mil]
  rect 70x70 hole 40: 1(0,0)
  round 70 hole 40: 2(100,0) 3(200,0)
  silkscreen extent -59,-50 250,94
CON6M-LINE [mil]
  rect 70x70 hole 40: 1(0,0)
  round 70 hole 40: 2(100,0) 3(200,0) 4(300,0) 5(400,0) 6(500,0)
  silkscreen extent -85,-50 550,50
CON8M-LINE [mil]
  rect 70x70 hole 40: 1(0,0)
  round 70 hole 40: 2(100,0) 3(200,0) 4(300,0) 5(400,0) 6(500,0) 7(600,0) 8(700,0)
  silkscreen extent -85,-50 750,50
CON_FTS-105-01-L-DV [mm]
  rect 0.8x2.5 smd: 1(-2.54,-2.032) 2(-2.54,2.032) 3(-1.27,-2.032) 4(-1.27,2.032) 5(0,-2.032) 6(0,2.032) 7(1.27,-2.032) 8(1.27,2.032) 9(2.54,-2.032) 10(2.54,2.032)
  silkscreen extent -3.8,-2.4 3.3,1.75, body extent -3.17,-2.92 3.18,2.92, height 4.33
CON_JCK_2.5MM [mm]
  oval 2.5x5.5 hole 1 slot 4 at 90 deg: 1(6.2,0)
  oval 2.5x5 hole 1 slot 3.5 at 90 deg: 2(0,0)
  oval 5x2.5 hole 1 slot 3.5 at 0 deg: 3(3,-4.65)
  silkscreen extent -7.5,-4.45 6,4.55, body extent -7.5,-4.86 6.98,4.61, height 11.18
CON_USB-B-MINI_SD-67503-010_5075BMR-05-SM-CR [mm] "Molex"
  rect 2.6x0.5 smd: 1(0.2,1.6) 2(0.2,0.8) 3(0.2,0) 4(0.2,-0.8) 5(0.2,-1.6)
  rect 4.25x2.05 smd: 6(-4.35,4.95) 9(-4.35,-4.95)
  rect 3.5x2.05 smd: 7(0,4.95) 8(0,-4.95)
  round 1 hole 1 unplated: 10(-2.35,2.2) 11(-2.35,-2.2)
  Top Layer, Top pour cut-out: -6.25,3.1 -5.05,3.1 -5.05,-3.1 -6.25,-3.1
  silkscreen extent 0.75,-3.6 1.85,3.6, body extent -8.25,-4.95 0.75,4.95, height 3.95
"CON_USB_MICRO_B_WE-629 105 136 821" [mm] "WE Micro USB 2.0 SMT Type B 5 Contacts"
  rect 0.4x1.35 smd: 1(-1.3,2.675) 2(-0.65,2.675) 3(0,2.675) 4(0.65,2.675) 5(1.3,2.675)
  rect 1.8x1.9 smd: 6(4,0) 9(-4,0)
  rect 1.9x1.9 smd: 7(1.2,0) 8(-1.2,0)
  round 0.7 hole 0.7 unplated: ""(-2.075,2.45) ""(2.075,2.45)
  silkscreen extent -4,-2.75 4,4.15, body extent -4,-2.76 4,3.15, height 2.69
GRETZ_MBS2 [mm]
  rect 1x1 smd: 1(-1.27,-3.099) 2(1.27,-3.099) 3(1.27,3.099) 4(-1.27,3.099)
  silkscreen extent -2.45,-2.1 2.45,2.1
INDCC_1812 [mil]
  rect 45x120 smd: 1(-82,0) 2(82,0)
  silkscreen extent -114,-70 114,70
INDCC_1812_1210 [mil]
  rect 45x120 smd: 1(-82,0) 2(82,0)
  rect 43.31x102.36 smd: 1(-60,0) 2(60,0)
  silkscreen extent -114,-70 114,70
LED_0603 [mm]
  rect 1x1.1 smd: 1(-0.85,0) 2(0.85,0)
  silkscreen extent -2.1,-0.9 1.7,0.9
Net_Tie_SMT_0.406mm [mil]
  round 16 smd paste-39.37 mask-39.37: 1(-19.68,0) 2(19.69,0)
  Top Layer, Top lines w16: -19.68,0 19.69,0
QFN50P600X600X100_HS-41N [mm] "QFN, 40-Leads, Body 6,00x6,00mm, Pitch 0,50mm, Thermal Pad 4,10x4,10mm, IPC Medium Density"
  rect 0.5x0.25 smd paste-1: 1(-3.1,2.25) 10(-3.1,-2.25) 21(3.1,-2.25) 30(3.1,2.25)
  rect 0.9x0.25 smd: 2(-2.9,1.75) 3(-2.9,1.25) 4(-2.9,0.75) 5(-2.9,0.25) 6(-2.9,-0.25) 7(-2.9,-0.75) 8(-2.9,-1.25) 9(-2.9,-1.75) 22(2.9,-1.75) 23(2.9,-1.25) 24(2.9,-0.75) 25(2.9,-0.25) 26(2.9,0.25) 27(2.9,0.75) 28(2.9,1.25) 29(2.9,1.75)
  rect 0.25x0.5 smd paste-1: 11(-2.25,-3.1) 20(2.25,-3.1) 31(2.25,3.1) 40(-2.25,3.1)
  rect 0.25x0.9 smd: 12(-1.75,-2.9) 13(-1.25,-2.9) 14(-0.75,-2.9) 15(-0.25,-2.9) 16(0.25,-2.9) 17(0.75,-2.9) 18(1.25,-2.9) 19(1.75,-2.9) 32(1.75,2.9) 33(1.25,2.9) 34(0.75,2.9) 35(0.25,2.9) 36(-0.25,2.9) 37(-0.75,2.9) 38(-1.25,2.9) 39(-1.75,2.9)
  rect 4.1x4.1 smd paste-5: EP(0,0)
  Top Layer, Top region: -3.35,2.375 -2.55,2.375 -2.45,2.275 -2.45,2.125 -3.35,2.125
  Top Layer, Top region: -2.375,3.35 -2.375,2.55 -2.275,2.45 -2.125,2.45 -2.125,3.35
  Top Layer, Top region: -3.35,-2.375 -2.55,-2.375 -2.45,-2.275 -2.45,-2.125 -3.35,-2.125
  Top Layer, Top region: -2.375,-3.35 -2.375,-2.55 -2.275,-2.45 -2.125,-2.45 -2.125,-3.35
  Top Layer, Top region: 2.375,-3.35 2.375,-2.55 2.275,-2.45 2.125,-2.45 2.125,-3.35
  Top Layer, Top region: 3.35,-2.375 2.55,-2.375 2.45,-2.275 2.45,-2.125 3.35,-2.125
  Top Layer, Top region: 3.35,2.375 2.55,2.375 2.45,2.275 2.45,2.125 3.35,2.125
  Top Layer, Top region: 2.375,3.35 2.375,2.55 2.275,2.45 2.125,2.45 2.125,3.35
  silkscreen extent -4,-3.2 3.2,3.2, body extent -3.05,-3.05 3.05,3.05, height 1
QUARTZ_32SMX [mm]
  rect 1.4x1.2 smd: 1(-1.1,-0.8) 2(1.1,-0.8) 3(1.1,0.8) 4(-1.1,0.8)
  silkscreen extent -2.4,-1.7 -2.1,-1.4, body extent -1.6,-1.2 1.6,1.2, height 0.6
QUARTZ_NX5032GA [mm]
  rect 2x2.4 smd: 1(-2,0) 2(2,0)
  silkscreen extent -2.5,-1.6 2.5,1.6, body extent -2.5,-1.6 2.5,1.6, height 1.3
SOIC8 [mil]
  rect 80x26 smd: 1(-110,75) 2(-110,25) 3(-110,-25) 4(-110,-75) 5(110,-75) 6(110,-25) 7(110,25) 8(110,75)
  silkscreen extent -116,-105 60,123, body extent -118,-98 118,98, height 69
SOT143B [mm]
  rect 1x0.7 smd: 1(0,-0.102)
  rect 0.6x0.7 smd: 2(1.676,-0.102) 3(1.676,2.134) 4(-0.203,2.134)
  silkscreen extent -0.76,0.25 2.24,1.78
SOT-23 [mil]
  rect 40x40 smd: 1(0,0) 2(80,0) 3(40,87)
  silkscreen extent -20,35 100,55, body extent -18,-6 97,92, height 40
SOT-223-3 [mm]
  rect 1x1.5 smd: 1(-2.3,-3.15) 2(0,-3.15) 3(2.3,-3.15)
  rect 3.3x1.5 smd: 4(0,3.15)
  silkscreen extent -3.25,-1.78 3.25,1.78, body extent -3.25,-1.8 3.25,1.8, height 1.8
SOT-457 [mm]
  rect 1.3x0.6 smd: 1(-1.35,0.95) 2(-1.35,0) 3(-1.35,-0.95) 4(1.35,-0.95) 5(1.35,0) 6(1.35,0.95)
  silkscreen extent -2.3,-1.6 0.45,2
SW_DTSM-32S-B [mm]
  rect 2x1.6 smd: 1(-2.7,0) 2(2.7,0)
  silkscreen extent -3,-1.75 3,1.75, body extent -3,-1.75 3,1.75, height 5
TESTP_ROUND_1.0mm [mm]
  round 1 smd paste-2: 1(0,0)
TSQFP50P1600X1600X160-100N [mm] "TSQFP, 100-Leads, Body 14,00x14,00mm, Pitch 0,50mm, IPC Medium Density"
  rect 1.5x0.3 smd: 1(-7.75,6) 2(-7.75,5.5) 3(-7.75,5) 4(-7.75,4.5) 5(-7.75,4) 6(-7.75,3.5) 7(-7.75,3) 8(-7.75,2.5) 9(-7.75,2) 10(-7.75,1.5) 11(-7.75,1) 12(-7.75,0.5) 13(-7.75,0) 14(-7.75,-0.5) 15(-7.75,-1) 16(-7.75,-1.5) 17(-7.75,-2) 18(-7.75,-2.5) 19(-7.75,-3) 20(-7.75,-3.5) 21(-7.75,-4) 22(-7.75,-4.5) 23(-7.75,-5) 24(-7.75,-5.5) 25(-7.75,-6) 51(7.75,-6) 52(7.75,-5.5) 53(7.75,-5) 54(7.75,-4.5) 55(7.75,-4) 56(7.75,-3.5) 57(7.75,-3) 58(7.75,-2.5) 59(7.75,-2) 60(7.75,-1.5) 61(7.75,-1) 62(7.75,-0.5) 63(7.75,0) 64(7.75,0.5) 65(7.75,1) 66(7.75,1.5) 67(7.75,2) 68(7.75,2.5) 69(7.75,3) 70(7.75,3.5) 71(7.75,4) 72(7.75,4.5) 73(7.75,5) 74(7.75,5.5) 75(7.75,6)
  rect 0.3x1.5 smd: 26(-6,-7.75) 27(-5.5,-7.75) 28(-5,-7.75) 29(-4.5,-7.75) 30(-4,-7.75) 31(-3.5,-7.75) 32(-3,-7.75) 33(-2.5,-7.75) 34(-2,-7.75) 35(-1.5,-7.75) 36(-1,-7.75) 37(-0.5,-7.75) 38(0,-7.75) 39(0.5,-7.75) 40(1,-7.75) 41(1.5,-7.75) 42(2,-7.75) 43(2.5,-7.75) 44(3,-7.75) 45(3.5,-7.75) 46(4,-7.75) 47(4.5,-7.75) 48(5,-7.75) 49(5.5,-7.75) 50(6,-7.75) 76(6,7.75) 77(5.5,7.75) 78(5,7.75) 79(4.5,7.75) 80(4,7.75) 81(3.5,7.75) 82(3,7.75) 83(2.5,7.75) 84(2,7.75) 85(1.5,7.75) 86(1,7.75) 87(0.5,7.75) 88(0,7.75) 89(-0.5,7.75) 90(-1,7.75) 91(-1.5,7.75) 92(-2,7.75) 93(-2.5,7.75) 94(-3,7.75) 95(-3.5,7.75) 96(-4,7.75) 97(-4.5,7.75) 98(-5,7.75) 99(-5.5,7.75) 100(-6,7.75)
  silkscreen extent -7.9,-6.6 6.6,6.85, body extent -7,-7 7,7, height 1.6
Y0402 [mm]
  rect 0.5x0.6 smd: 1(-0.508,0) 2(0.508,0)
  silkscreen extent -0.95,-0.5 0.95,0.5
Y0603 [mm]
  rect 0.9x0.8 smd: 1(-0.864,0) 2(0.864,0)
  silkscreen extent -1.55,-0.65 1.55,0.65
Y0805 [mm]
  rect 0.9x1.27 smd: 1(-1.067,0) 2(1.067,0)
  silkscreen extent -1.8,-0.9 1.8,0.9

## Part data
C100 C103 C104 C107 C108 C109 C110 C200 C201 C202 C203 C204 C214 C301 C302 C303 C304 C309 C319 C323 C324 C326 C327 C328 C331 C332: library part CAPC0603, "CAPC0603"
C101 C102: library part C_TANTAL_1206, "C_TANTAL_1206"
C105 C106 C300: library part C_TANTAL_B, "C_TANTAL_B"
C205 C206 C207 C208 C209 C210 C211 C212 C213 C325 C329 C330: library part CAPC0402, "CAPC0402"
C305 C306 C307 C308 C310 C311 C312 C313 C314 C315 C316 C317 C318 C320 C321 C322: library part CAPC0805, "CAPC0805"
D100: library part GRETZ_MBS2, "GRETZ_MBS2_Schottky"
D101: library part D_IP4220CZ6, "D_IP4220CZ6"
IC100: library part LM3940-3.3
IC101: library part LM3940-3.3, "LM3940-3.3"
IC200: library part LPC176XFBD100, "LQFP100"
IC202: library part 24CXX, "SERIAL EEPROM"
IC300: "13.56 MHz Reader"
J100: library part CON_JCK_2.5mm, "PWR_JACK_2.1mm x 5.5mm"
J101 J201 J303: library part CON3M_LINE, "CON3M_LINE"
J102: library part CON_USB_B_RA, "CON_USB_B_RA"
J103: library part CON_USB_MICRO_B, "CON_USB_MICRO_B"
J200: library part CON_JTAG_PINS, "50mil, 2x5 pin (M), SMD"
J300 J304: library part JMP2, "JMP2"
L2: library part ANTENNA_65X65MM_2TURNS_FRED
L100 L301 L302: library part INDC1812, "INDC1812"
L101 L102: library part INDC0603, "INDC0603"
L300: library part INDC0805, "INDC0805"
LD200 LD201 LD202 LD203 LD300 LD301 LD302: library part LEDY0603, "LEDY0603"
NT1: "Component for shorting nets in design"
R100 R101 R102 R103 R104 R105 R200 R201 R202 R203 R204 R205 R206 R207 R208 R209 R210 R211 R212 R213 R214 R215 R216 R217 R218 R219 R220 R221 R222 R223 R224 R225 R226 R227 R228 R229 R230 R231 R236 R237 R238 R300 R301 R302 R303 R304 R305 R306 R307 R308 R312 R318 R319 R320 R321 R322 R323 R324 R325 R326 R327: library part RESC0603, "RESC0603"
R232 R233 R234 R235 R309 R310 R311 R313 R314 R315 R316 R317: library part RESC0805, "RESC0805"
R239 R240 R241 R242: library part RESC0402, "RESC0603"
SW200: library part SWITCH_SMD, "DTSM-32S-B"
SW201 SW300: library part SWITCH_SMD
XT200: library part QUARTZ_NX5032, "QUARTZ_NX5032"
XT300: library part QUARTZ_32SMX, "QUARTZ_32SMX"

## Free pads (board coordinates)
  round 3.2 hole 3.2 unplated: 1(3.378,4.002) 1(3.378,55.31) 1(64.795,4.002) 1(64.795,55.31)

## Via types
v1: diameter 0.7, hole 0.3, Top Layer, Top to Bottom Layer, Bottom, 324 vias
v2: diameter 0.5, hole 0.3, Top Layer, Top to Bottom Layer, Bottom, 16 vias
v3: diameter 0.6, hole 0.3, Top Layer, Top to Bottom Layer, Bottom, 2 vias

## Nets (pads, with @x,y where several pads share a name; then routed paths per layer and width w, separated by ;. In a path a pad name is that pad's centre, name@x,y a point inside that pad or via, vN(x,y) a via of type N, cw(c..) or ccw(c..) an arc to the next point about the centre after c; other vN are vias at no path point)
+3.3V: C200.1 C206.2 C207.2 C208.2 C209.2 C210.2 C211.2 C212.2 C213.2 C214.2 IC200.10 IC200.12 IC200.28 IC200.42 IC200.54 IC200.71 IC200.84 IC200.96 IC201.4 IC202.8 J200.1 J301.1 J303.3 K101.1 R101.1 R104.2 R200.2 R201.2 R202.2 R203.2 R204.2 R205.1 R208.1 R211.1 R213.1 R214.1 R218.2 R219.2 R224.2 R225.1 R227.1 R228.1 R230.1 R236.2 R300.2 R303.2 R306.2 R323.1 R325.2 T100.2 | length 85.5
  Top Layer, Top w0.2: v1@12.736,23.286 v1(12.75,23.3) 13.4,23.95 R208.1@13.4,24.786 ; R205.1@32.286,38.55 32.286,37.564 v1(32.3,37.55) ; v1(38.9,12.65) 38.914,12.636 R230.1@39.95,12.636 ; v1(39.95,18.7) R227.1@39.95,17.664 R228.1@41.25,17.664
  Top Layer, Top w0.25: v1(8.25,9.1) 8.253,9.097 IC201.4@9.316,9.097 ; R203.2@10.514,15.8 R202.2@10.514,17.1 R236.2@10.514,18.4 ; R201.2@10.514,19.7 R236.2@10.514,18.4 ; v1(11.55,18.4) R236.2@10.514,18.4 ; T100.2@13.15,31.082 14.482,31.082 R104.2@14.65,30.914 14.65,31.65 v1(15.3,32.3) ; IC200.96@22.5,31.25 22.5,32.842 C211.2@22.758,33.1 22.758,33.992 v1(22.75,34) ; R219.2@27.464,38.1 v1(28.5,38.1) ; v1(28.25,34) 28.242,33.992 C207.2@28.242,33.1 28.5,32.842 IC200.84@28.5,31.25 ; IC200.42@28.5,15.75 28.5,14.158 C206.2@28.758,13.9 28.758,13.058 v1(28.75,13.05) ; v1(36.8,12.6) R224.2@36.8,13.636 ; R225.1@52.35,14.864 53.336,14.864 v1(53.35,14.85) ; v1(56.6,13.45) R300.2@56.6,14.536 ; v1(60.4,13.45) R303.2@60.4,14.536 ; v1(64.2,13.45) R306.2@64.2,14.536
  Top Layer, Top w0.3: C213.2@16.258,23.65 v1(17.05,23.65) 17.4,24 IC200.12@18.75,24 ; C212.2@16.258,25.35 v1(17.05,25.35) 17.4,25 IC200.10@18.75,25 ; R214.1@17.6,11.986 R213.1@18.9,11.986 v1(18.9,10.95) ; v1(21.2,13.05) 21.208,13.058 C208.2@21.208,13.9 21.2,13.908 21.2,14.4 21.5,14.7 IC200.28@21.5,15.75 ; IC200.54@34.25,19 C209.2@35.892,19 ; IC200.71@34.25,27.5 35.892,27.5 C210.2@36.15,27.242 36.992,27.242 v1(37,27.25) ; C209.2@35.892,18.85 35.892,18.558 36.45,18 v1(36.7,18) ; R325.2@49,19.836 49,18.85 v1(49.45,18.4) ; R323.1@57.014,20.65 57.014,19.236 57.6,18.65 v1(57.6,16.85)
  Top Layer, Top w0.5: J200.1@1.818,21.24 C200.1@1.818,23.232 ; C200.1@1.836,23.25 1.836,23.986 2.1,24.25 6.75,24.25 7.286,24.786 R204.2@8.2,24.786 R211.1@9.5,24.786 9.5,24 10.514,22.986 R200.2@10.514,22.3 ; R200.2@10.614,22.3 v1(11.65,22.3) R218.2@12.536,22.3 ; R218.2@12.736,22.3 v1@12.736,23.286 ; v1(42.6,10.1) 42.6,10.886 C214.2@42.964,11.25 42.964,12.014 43.314,12.364 IC202.8@43.314,13.087 ; K101.1@57.55,49.15 v1(56.45,49.15) ; v1(55.05,47.95) v1(56.45,47.95) v1(56.45,49.15) ; v1(55.05,47.95) v1(53.7,47.95) v1(53.7,49.15) 55.036,49.15 R101.1@55.05,49.136 ; v1(55.05,47.95) R101.1@55.05,49.136 ; R101.1@55.05,49.136 55.064,49.15 v1(56.45,49.15)
  MidLayer1 w0.5: 49.45,16.85 v1(49.45,18.4)
  MidLayer1 w1: J301.1@30.251,1.5 30.251,3.199
+3.3VREG: C106.1 C107.1 IC101.3 R101.2 R324.1 | length 41.3
  Top Layer, Top w0.5: R101.2@55.05,50.864 55.064,50.85 v1(56.25,50.85) ; R324.1@57.014,23.25 v1(58.05,23.25)
  Top Layer, Top w1.5: IC101.3@49.4,51 52.55,51 C106.1@52.6,51.05 54.864,51.05 R101.2@55.05,50.864 C107.1@55.05,52.236
  Bottom Layer, Bottom w0.3: v1(56.25,50.85) 58.35,48.75 58.35,37.35 54.45,33.45 54.45,26.15 57.35,23.25 v1(58.05,23.25)
+5V: J101.2 J300.2 J303.1 K100.1 R100.2 R102.2 | length 36.3
  Top Layer, Top w0.2: R102.2@26.914,45.7 31.505,45.7 J101.2@33.071,44.134
  Top Layer, Top w0.5: K100.1@33.05,41.9 33.071,41.921 J101.2@33.071,44.134
  Top Layer, Top w1.5: R100.2@39.4,48.636 39.4,46.5 46.65,46.5 47.794,45.356 J300.2@47.794,44.134
  Bottom Layer, Bottom w0.5: 39.4,46.5 43.55,46.5 44.238,45.812 J303.1@44.238,44.134
  Bottom Layer, Bottom w1.5: J101.2@33.071,44.134 33.071,45.671 33.9,46.5 39.4,46.5
  other v1: 39,46.1 39.8,46.1 39,46.9 39.8,46.9
AD0: IC200.9 R208.2 R209.2 | length 7.1
  Top Layer, Top w0.2: R209.2@12.1,26.514 R208.2@13.4,26.514 16.836,26.514 17.85,25.5 IC200.9@18.75,25.5
AD1: IC200.8 R210.2 | length 8.8
  Top Layer, Top w0.2: R210.2@10.8,26.514 11.586,27.3 16.616,27.3 17.916,26 IC200.8@18.75,26
AD4: IC200.21 R212.2 | length 4.4
  Top Layer, Top w0.2: R212.2@14.464,19.7 15.25,19.7 15.45,19.5 IC200.21@18.75,19.5
AUX1: IC300.40 J302.3 R321.2 | length 72.4
  Top Layer, Top w0.2: J302.3@16.408,1.5 18.758,3.85 31.55,3.85 32.45,4.75 v1(38.6,4.75) ; v1(45.6,24.4) 46.2,24.4 46.45,24.65 IC300.40@46.45,25
  Top Layer, Top w0.3: R321.2@57.864,26.55 v1(58.9,26.55)
  Bottom Layer, Bottom w0.2: v1(38.6,4.75) 38.6,10.75 40.65,12.8 40.65,21.35 43.7,24.4 v1(45.6,24.4) 50.4,24.4 53.05,21.75 53.85,21.75 56,19.6 58.95,19.6 59.65,20.3 59.65,25.8 v1(58.9,26.55)
AUX2_DWL: IC300.2 J302.4 J304.2 R207.1 | length 51.5
  Top Layer, Top w0.2: J302.4@18.948,1.5 20.898,3.45 32,3.45 32.8,4.25 35.8,4.25 36,4.05 v1(37.4,4.05) ; v1(38.2,14.85) R207.1@38.2,15.936 ; v1(39.2,20.15) 41.4,20.15 43.15,18.4 45.39,18.4 J304.2@46.89,19.9 46.89,22.84 47.8,23.75 IC300.2@47.8,24.35
  Bottom Layer, Bottom w0.2: v1(37.4,4.05) 37.4,11.05 38.2,11.85 v1(38.2,14.85) 38.2,19.15 v1(39.2,20.15)
BL1: IC200.53 K201.1 R224.1 | length 4.8
  Top Layer, Top w0.2: IC200.53@34.25,18.5 35.25,18.5 36,17.75 36,17.65 K201.1@36.8,16.85 R224.1@36.8,15.364
BL2: IC200.67 K202.1 R205.2 SW200.1 | length 18.9
  Top Layer, Top w0.2: R205.2@34.014,38.55 v1(35.25,38.55) SW200.1@36.85,38.55 ; IC200.67@34.25,25.5 35.384,25.5 35.884,26 36.7,26 v1(37,26.3)
  Bottom Layer, Bottom w0.2: v1(35.25,38.55) 35.25,28.05 v1(37,26.3)
BUSY: IC300.8 J301.7 R233.1 R234.1 R301.2 | length 56.2
  Top Layer, Top w0.2: R234.1@33.05,8.733 R233.1@34.85,8.733 39.8,8.733 40.85,7.683 49.583,7.683 v1(49.6,7.7) ; J301.7@45.491,1.5 47.041,3.05 v1(49.6,3.05) v1(55.85,3.05) ; IC300.8@50.8,24.35 50.8,23.6 51.75,22.65 51.75,21.6 v1(51.1,20.95) ; R301.2@55.864,7.2 v1(56.9,7.2)
  Bottom Layer, Bottom w0.2: v1(49.6,3.05) v1(49.6,7.7) 49.6,16.25 51.1,17.75 v1(51.1,20.95) ; v1(55.85,3.05) 55.85,6.15 v1(56.9,7.2)